# Altium PCB MGMEZZ02.PCBDOC (part 4 of 5)
Units mil, origin at the board's own origin, x right, y up, seen from the top; angles counter-clockwise.
Board outline 5705.83 x 3625.73 mil, 6 copper layers (Top Layer, Internal Plane 1, Mid-Layer 1, Mid-Layer 2, Internal Plane 2, Bottom Layer); 570 components, 354 nets, 2192 pads, 728 vias.
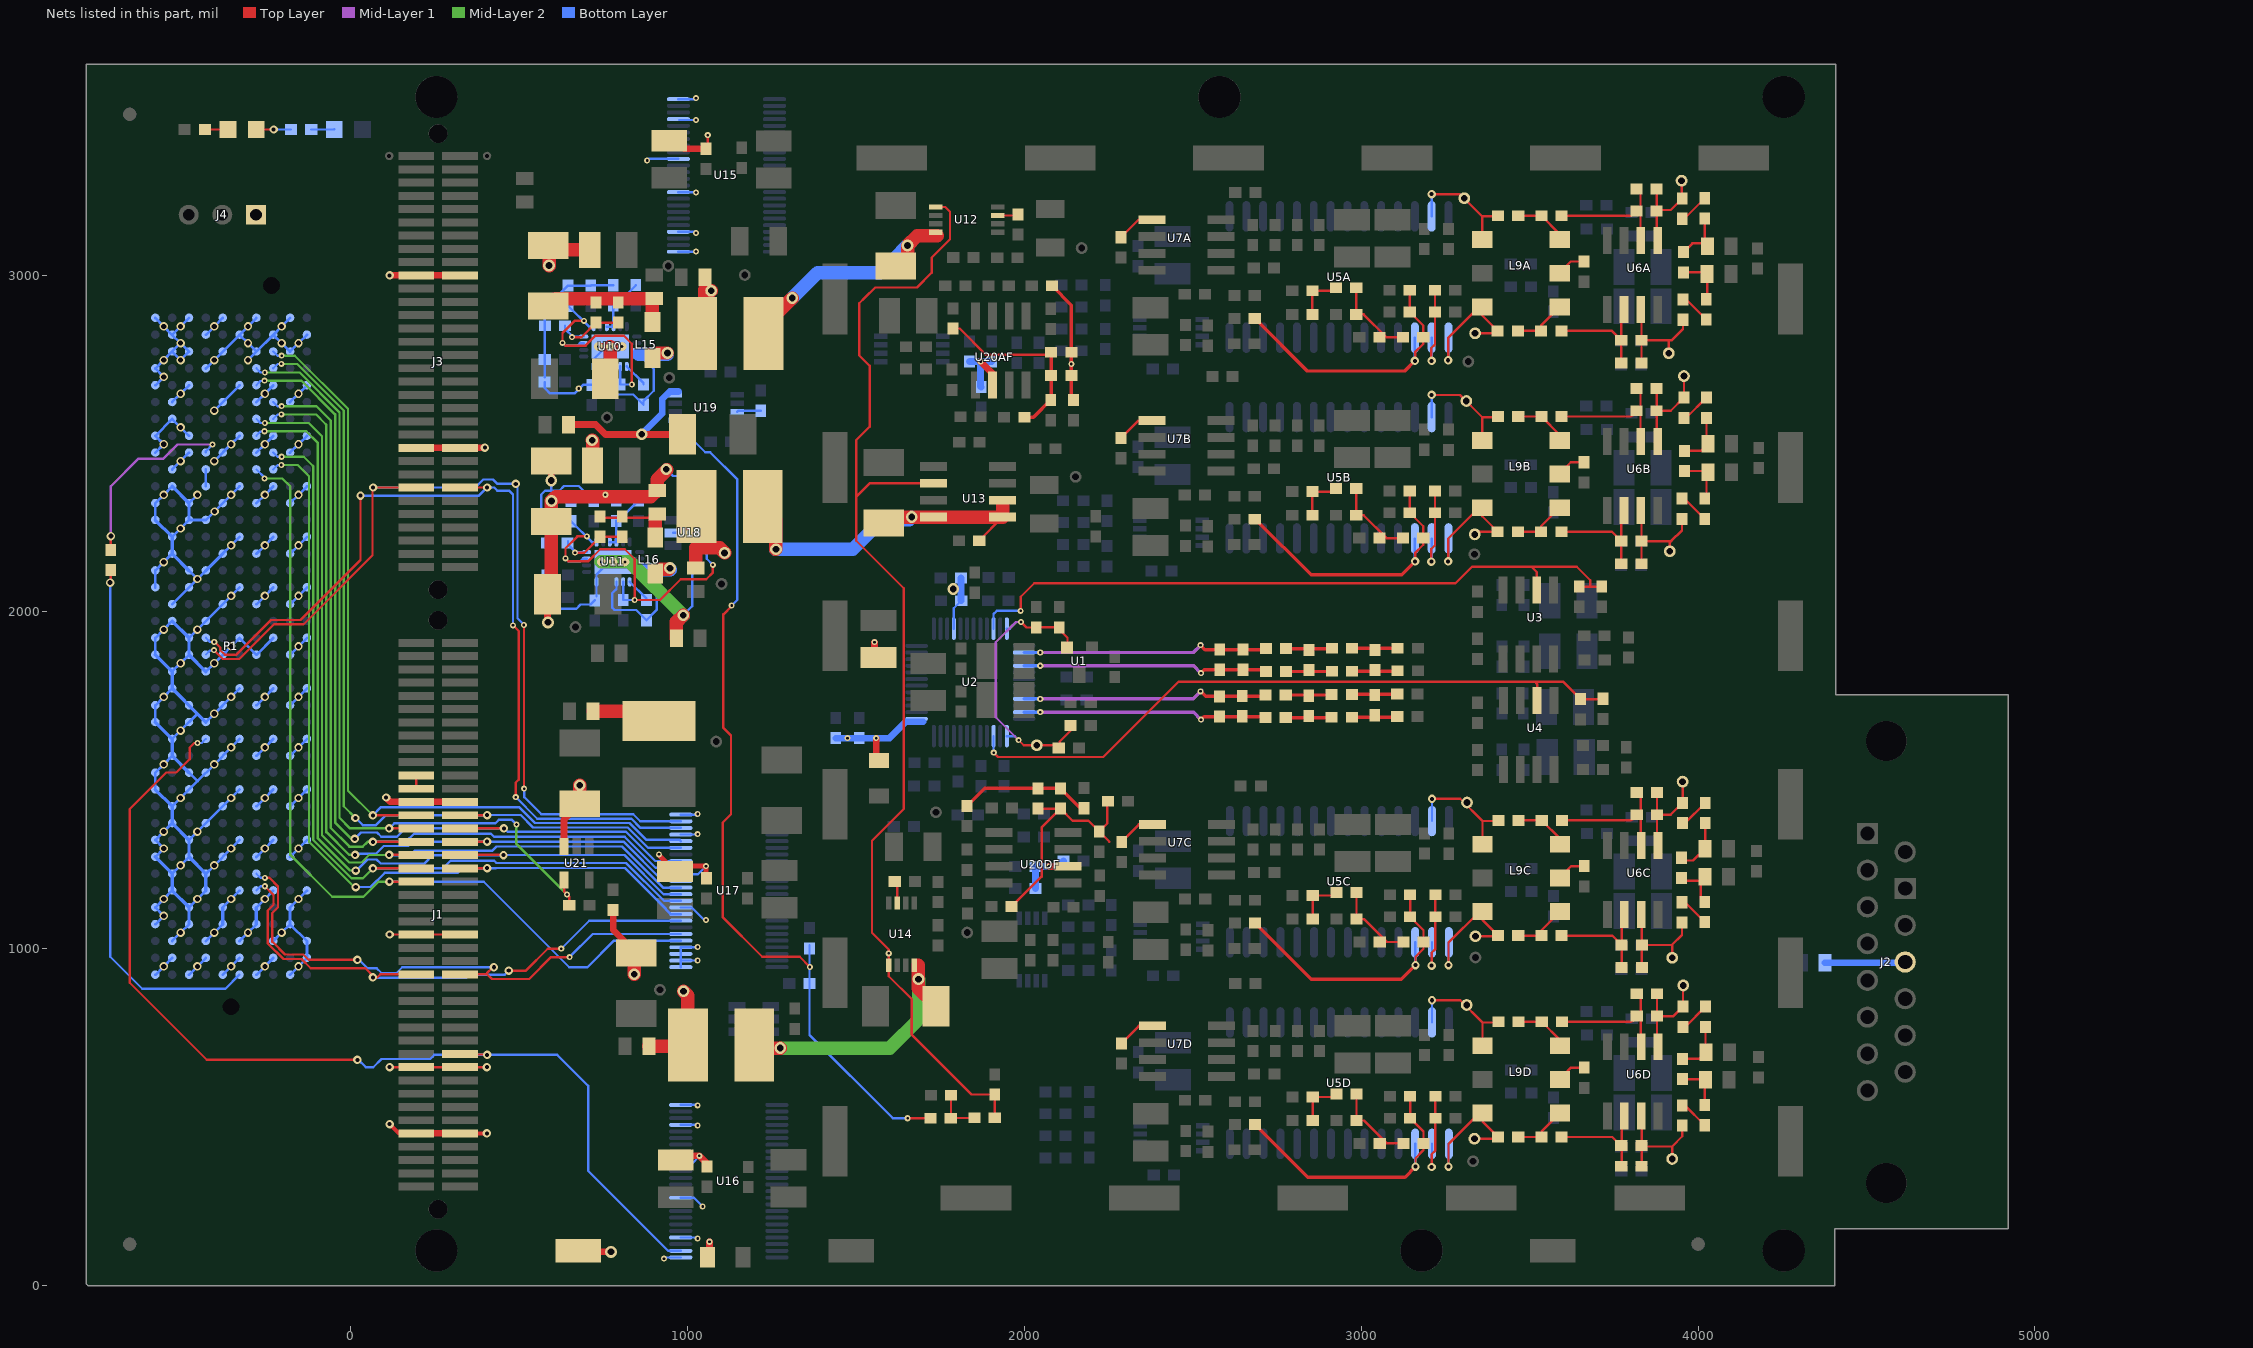
[diagram p8: the nets of this part, all layers, seen from the top]

## Via types
v1: diameter 25, hole 12, Top Layer to Bottom Layer, 292 vias
v2: diameter 18, hole 8, Top Layer to Bottom Layer, 225 vias
v3: diameter 25, hole 15, Top Layer to Bottom Layer, tented both sides, 91 vias
v4: diameter 18, hole 8, Top Layer to Bottom Layer, tented both sides, 61 vias
v5: diameter 35, hole 20, Top Layer to Bottom Layer, 58 vias
v6: diameter 40, hole 20, Top Layer to Bottom Layer, 1 vias

## Nets (pads, with @x,y where several pads share a name; then routed paths per layer and width w, separated by ;. In a path a pad name is that pad's centre, name@x,y a point inside that pad or via, vN(x,y) a via of type N, cw(c..) or ccw(c..) an arc to the next point about the centre after c; other vN are vias at no path point) (continued)
MBDACDATACD15: J1.64 P1.D15 U16.26 | length 3071.7
  Top Layer w7: v4(-454.98,1610.49) -464.51,1610.49 -478,1597 -478,1562.8 -517.8,1523 -547.54,1523 -656,1414.54 -656,899.08 -427.16,670.23 v1@21.23,670.23 ; J1.64@324.55,688 v1(404.85,684.73)
  Bottom Layer w6.5: v4(-454.98,1610.49) -442.48,1610.49 P1.D15@-429.98,1622.99
  Bottom Layer w7: v1@22,671 45,648 67,648 91.78,672.78 235.93,672.78 247.88,684.73 v1(404.85,684.73) 613.11,684.73 705,592.84 705,340 941.81,103.19 U16.26@979.74,103.19
  other v1: 20,670.23
MBFASTDACCLKA: J3.51 P1.D20 U17.47 | length 2842.6
  Top Layer w6.5: v4(-405.74,1886.25) -379.74,1860.25 -330.75,1860.25 -227.75,1963.25 -139.75,1963.25 64.9,2167.9 v1@64.9,2369.27
  Top Layer w7: v1@64.9,2369.27 v1(66.55,2369.27) J3.51@194.63,2369.27 ; v2(515,1475) 514.5,1475.5 514.5,1960.7 v2@515,1961.2
  Bottom Layer w6.5: P1.D20@-429.98,1872.99 -417.48,1885.49 -404.98,1885.49 v4(-405.74,1886.25)
  Bottom Layer w7: v1(66.55,2369.27) 369.98,2369.27 393.62,2393.13 422.63,2393.13 435.77,2380 485,2380 495,2370 495,1981.25 v2@515,1961.25 ; v2(515,1475) 515,1450 566,1399 838.75,1399 859.41,1378.34 U17.47@980.1,1378.34
  other v1: 490,2380
  other v2: 514,1961.2
MBFASTDACCLKB: J3.52 P1.D21 U17.46 | length 2782.4
  Top Layer w7: v4(-404.98,1910.49) -403.81,1910.49 -387.24,1893.92 -387.24,1886.24 -374,1873 -339.29,1873 -236.29,1976 -149,1976 29,2154 v1(29,2345) ; J3.52@324.55,2369.27 v1(404.85,2369.27) ; v2(482,1960) 499,1943 499,1502 490,1493 v2(490,1450)
  Bottom Layer w6.5: P1.D21@-429.98,1922.99 -417.48,1910.49 v4(-404.98,1910.49)
  Bottom Layer w7: v1(29,2345) 380.58,2345 v1(404.85,2369.27) 426.07,2369.27 435.33,2360 470,2360 482,2348 v2@482,1958 ; v2(490,1450) 554,1386 833.37,1386 860.71,1358.66 U17.46@980.1,1358.66
MBFASTDACCLKC: J1.51 P1.G6 U17.32 | length 1675.2
  Top Layer w7: v4(-254.98,1185.49) -229,1159.51 -229,1130.38 -246,1113.38 -246,1015.62 -199.9,969.52 -145.86,969.52 -118.35,942 44,942 71,915 79,915 87.8,923.8 J1.51@194.52,923.8 ; v1(469.23,935) 520,935 585,1000 v2(625,1000)
  Bottom Layer w6.5: P1.G6@-279.98,1172.99 -267.48,1185.49 v4(-254.98,1185.49)
  Bottom Layer w7: 79,915 80,914 344,914 352.99,922.99 457.22,922.99 v1(469.23,935) ; v2(625,1000) 708.07,1083.07 U17.32@980.1,1083.07
  other v1: 66,915
MBFASTDACCLKD: J1.52 P1.G7 U17.30 | length 1700.6
  Top Layer w7: v4(-254.98,1210.49) -241.49,1210.49 -216,1185 -216,1123 -233,1106 -233,1021 -195,983 -140.96,983 -124.96,967 v1@25,967 ; J1.52@324.55,924.2 404.85,924.2 ; v1@420,943 404.85,927.85 404.85,924.2 ; v2(650,975) 595,975 530,910 419.05,910 404.85,924.2
  Bottom Layer w6.5: P1.G7@-279.98,1222.99 -267.48,1210.49 v4(-254.98,1210.49)
  Bottom Layer w7: v1@22.5,969.5 50,942 76.93,942 91.93,927 135,927 153,945 v1(425,945) ; v2(650,975) 718.7,1043.7 U17.30@980.1,1043.7
  other v1: 20,967
MBGND: C32.1 C38.1 C39.1 C40.1 C46.1 C49.2 C50.1 C51.2 C54.1 C55.2 C56.1 C57.1 C59.1 C97.2 C100.1 C104.2 C107.2 C114.2 C115.2 C118.2 C119.2 C122.2 C123.2 C127.2 DP1.2 J1.25 J1.26 J1.45 J1.46 J1.65 J1.66 J1.75 J1.76 J3.19 J3.20 J3.45 J3.46 J4.1 J5.1 P1.A1 P1.A4 P1.A5 P1.A8 P1.A9 P1.A12 P1.A13 P1.A16 P1.A17 P1.A20 P1.A21 P1.A24 P1.A25 P1.A28 P1.A29 P1.A32 P1.A33 P1.A36 P1.A37 P1.A40 P1.B2 P1.B3 P1.B6 P1.B7 P1.B10 P1.B11 P1.B14 P1.B15 P1.B18 P1.B19 P1.B22 P1.B23 P1.B26 P1.B27 P1.B30 P1.B31 P1.B34 P1.B35 P1.B38 P1.B39 P1.C1 P1.C4 P1.C5 P1.C8 P1.C9 P1.C12 P1.C13 P1.C16 P1.C17 P1.C20 P1.C21 P1.C24 P1.C25 P1.C28 P1.C29 P1.C32 P1.C33 P1.C36 P1.C38 P1.C40 P1.D2 P1.D3 P1.D6 P1.D7 P1.D10 P1.D13 P1.D16 P1.D19 P1.D22 P1.D25 P1.D28 P1.D37 P1.D39 P1.E1 P1.E4 P1.E5 P1.E8 P1.E11 P1.E14 P1.E17 P1.E20 P1.E23 P1.E26 P1.E29 P1.E32 P1.E35 P1.E38 P1.E40 P1.F2 P1.F3 P1.F6 P1.F9 P1.F12 P1.F15 P1.F18 P1.F21 P1.F24 P1.F27 P1.F30 P1.F33 P1.F36 P1.F39 P1.G1 P1.G4 P1.G5 P1.G8 P1.G11 P1.G14 P1.G17 P1.G20 P1.G23 P1.G26 P1.G29 P1.G32 P1.G35 P1.G38 P1.G40 P1.H2 P1.H3 P1.H6 P1.H9 P1.H12 P1.H15 P1.H18 P1.H21 P1.H24 P1.H27 P1.H30 P1.H33 P1.H36 P1.H39 P1.J1 P1.J4 P1.J5 P1.J8 P1.J11 P1.J14 P1.J17 P1.J20 P1.J23 P1.J26 P1.J29 P1.J32 P1.J35 P1.J38 P1.J40 P1.K2 P1.K3 P1.K6 P1.K9 P1.K12 P1.K15 P1.K18 P1.K21 P1.K24 P1.K27 P1.K30 P1.K33 P1.K36 P1.K39 R59.2 R64.1 R66.1 R68.2 R70.1 R72.1 R75.2 R80.1 R81.1 R103.1 U2.25 U2.40 U10.6 U10.21 U15.25 U15.28 U15.34 U15.39 U15.45 U15.48 U16.25 U16.28 U16.34 U16.39 U16.45 U16.48 U17.25 U17.26 U17.27 U17.28 U17.34 U17.39 U17.45 U17.48 U21.3 | length 15254.7
  Top Layer w7: DP1.2@-280.4,3432.18 v1@-229.18,3432.18 ; v1(115.87,648.63) v1(404.35,648.63) v1@403.55,649.43 ; v1(115.87,1042.3) J1.46@324.55,1042.3 ; v1@403.55,452.6 v1(404.35,451.8) ; C115.2@1055,3375 1060,3380 v2(1060,3415)
  Top Layer w12: v1(115.6,479) 142.8,451.8 J1.75@194.63,451.8 ; J1.76@324.55,451.8 v1(404.35,451.8)
  Top Layer w15: v2(915,1280) 915,1277.2 C122.2@962.81,1229.39 978.43,1245 v2(1055,1245) 1055,1210.78 C123.2@1056.42,1209.36
  Top Layer w20: v1@-229.18,3432.18 v1(-229,3432) ; v1(105,1449) 118.03,1435.97 J1.26@324.55,1435.97 ; v1(115.87,2999.13) J3.20@324.55,2999.13 ; J1.75@194.63,451.8 J1.76@324.55,451.8 ; J3.45@194.63,2487.37 v1(398.37,2487.37) ; v5(585.77,1968.83) 584.3,1970.3 C100.1@584.3,2052.12 C100.1@595.32,2063.14 ; C55.2@586.73,3087.57 588.99,3085.3 C55.2@599.97,3074.33 ; C56.1@595.32,2267.88 C56.1@595.97,2268.53 ; U21.3@633.5,1303.53 633.5,1383.78 C107.2@680.12,1430.4 ; J5.1@675,103.75 678.75,100 v5(773,100) ; U10.21@735.5,2787.76 U10.21@770.5,2787.75 U10.21@805.5,2787.76 ; C97.2@755.71,2691.81 C97.2@770.5,2706.6 ; C127.2@779.09,1115 779.09,1056.4 C104.2@847.88,987.6 ; C114.2@945.87,3398.85 966.15,3398.85 990,3375 C115.2@1055,3375 ; C118.2@964.96,372.56 977.4,385 v2(1035,385) 1057.49,362.51 C119.2@1057.49,353.4 ; R80.1@1059.64,84.11 1065,89.47 v2(1065,130) ; v2(1555,1910) 1555,1876.65 C32.1@1567.31,1864.34 ; v2(1560,1625) 1560,1567.21 R81.1@1568.38,1558.83
  Top Layer w40: v5(588.99,3028.18) C55.2@588.99,3085.3 ; C100.1@595.32,2063.14 C56.1@595.32,2267.88 ; C56.1@595.97,2268.53 v5(595.97,2329.19) 608.05,2341.26 890.36,2341.26 R59.2@909.38,2360.28 909.38,2392.24 v5@938.5,2421.37 ; C55.2@599.97,3074.33 C51.2@709.36,3074.33 ; v5(680,1485) 680,1430.52 C107.2@680.12,1430.4 ; v5(716.72,2509.24) 717.95,2508.01 C49.2@717.95,2434.64 ; C97.2@770.5,2706.6 U10.21@770.5,2787.75 ; v5(842,924.2) 842,981.72 C104.2@847.88,987.6
  Bottom Layer w7: v1(-229,3432) R103.1@-177,3432 ; R70.1@575.85,2682.31 575.85,2664.33 591.68,2648.5 664.47,2648.5 689.86,2673.88 R68.2@715.64,2673.88 ; R70.1@576.1,2696.81 576.1,2899.22 C57.1@645.51,2968.62 R66.1@712.9,2968.62 714.05,2969.78 C54.1@779.72,2969.78 ; v5(595.97,2329.19) 596.22,2328.94 C59.1@654.09,2328.94 ; R68.2@721.29,2685.57 U10.6@721.29,2728.7 721.29,2750.72 748.93,2778.37 761.11,2778.37 U10.21@770.5,2787.75 ; v2(755.93,2347.59) 770.8,2347.59 C50.1@788.3,2330.09 ; v2(880,3340) 884.64,3344.64 U15.39@972.73,3344.64 ; v2(930,80) 933.51,83.51 U16.25@979.74,83.51 ; v5(936.5,2423.37) 956.46,2403.41 R75.2@983.97,2403.41 ; U15.25@972.73,3069.05 1024.05,3069.05 v2(1025,3070) ; U15.28@972.73,3128.11 1021.89,3128.11 v2(1025,3125) ; U15.34@972.73,3246.22 1023.78,3246.22 v2(1025,3245) ; U15.48@972.73,3521.81 1021.81,3521.81 v2(1025,3525) ; U15.45@975.49,3460 v2(1025,3460) ; U16.28@979.74,142.56 1027.44,142.56 v2(1030,140) ; U16.34@979.74,260.67 1019.33,260.67 v2(1045,235) ; U16.39@979.74,359.1 984.02,363.38 1014.67,363.38 1035,383.71 v2(1035,385) ; U16.45@979.74,477.21 1027.79,477.21 v2(1030,475) ; U16.48@979.74,536.26 1028.74,536.26 v2(1030,535) ; U17.25@980.1,945.27 U17.26@980.1,964.96 ; U17.34@980.1,1122.44 1012.56,1122.44 v2@1052.5,1082.5 ; U17.39@980.1,1220.86 1030.86,1220.86 v2(1055,1245) ; U17.45@980.1,1338.97 1028.97,1338.97 v2(1030,1340) ; U17.48@980.1,1398.03 v2@1028.03,1398.03 ; v2(1030,965) 1029.96,964.96 U17.26@980.1,964.96 ; v2(1030,1005) 1029.33,1004.33 U17.28@980.1,1004.33 U17.27@980.1,984.64 U17.26@980.1,964.96 ; U2.40@1790.37,1950.23 1790.37,2010.57 C40.1@1812.59,2032.78
  Bottom Layer w8: P1.A1@-579.98,922.52 v3(-554.98,947.52) P1.B2@-529.98,972.52 ; P1.A4@-579.98,1072.52 v3(-554.98,1097.52) -579.98,1122.52 v3(-554.98,1147.52) P1.B6@-529.98,1172.52 ; P1.A8@-579.98,1272.52 v3(-554.98,1297.52) -579.98,1322.52 v3(-554.98,1347.52) P1.B10@-529.98,1372.52 ; P1.A12@-579.98,1472.52 -579.98,1522.52 v3(-554.98,1547.52) P1.B14@-529.98,1572.52 ; P1.A16@-579.98,1672.52 -579.98,1722.52 v3(-554.98,1747.52) P1.B18@-529.98,1772.52 ; P1.A20@-579.98,1872.52 -579.98,1922.52 v3(-554.98,1947.52) P1.B22@-529.98,1972.52 ; P1.A24@-579.98,2072.52 -579.98,2122.52 v3(-554.98,2147.52) P1.B26@-529.98,2172.52 ; P1.A28@-579.98,2272.52 -579.98,2322.52 v3(-554.98,2347.52) P1.B30@-529.98,2372.52 ; P1.A32@-579.98,2472.52 v3(-554.98,2497.52) -579.98,2522.52 -529.98,2572.52 v3(-504.98,2547.52) P1.C33@-479.98,2522.52 ; P1.A36@-579.98,2672.52 v3(-554.98,2697.52) -579.98,2722.52 v3(-554.98,2747.52) P1.B38@-529.98,2772.52 ; P1.A40@-579.98,2872.52 v3(-554.98,2847.52) P1.B39@-529.98,2822.52 ; P1.B3@-529.98,1022.52 v3(-504.98,1047.52) P1.C4@-479.98,1072.52 ; P1.B7@-529.98,1222.52 v3(-504.98,1247.52) P1.C8@-479.98,1272.52 ; P1.B11@-529.98,1422.52 v3(-504.98,1447.52) -454.98,1497.52 ; P1.B15@-529.98,1622.52 v3(-504.98,1647.52) -454.98,1697.52 ; P1.B19@-529.98,1822.52 v3(-504.98,1847.52) P1.C20@-479.98,1872.52 ; P1.B23@-529.98,2022.52 v3(-454.98,2097.52) ; P1.B27@-529.98,2222.52 v3(-504.98,2247.52) -479.98,2272.52 -429.98,2272.52 v3@-404.98,2297.52 ; P1.B31@-529.98,2422.52 v3(-504.98,2447.52) P1.C32@-479.98,2472.52 ; P1.B35@-529.98,2622.52 v3(-504.98,2647.52) P1.C36@-479.98,2672.52 ; P1.C1@-479.98,922.52 v3(-454.98,947.52) P1.D2@-429.98,972.52 ; P1.C5@-479.98,1122.52 v3(-454.98,1147.52) P1.D6@-429.98,1172.52 ; P1.C9@-479.98,1322.52 v3(-454.98,1347.52) v3(-354.98,1447.52) P1.F12@-329.98,1472.52 ; P1.C13@-479.98,1522.52 -454.98,1497.52 ; P1.C21@-479.98,1922.52 v3(-454.98,1947.52) v3(-354.98,2047.52) P1.F24@-329.98,2072.52 ; P1.C25@-479.98,2122.52 v3(-454.98,2097.52) ; P1.C29@-479.98,2322.52 v3(-454.98,2347.52) ; P1.C40@-479.98,2872.52 v3(-504.98,2847.52) P1.B39@-529.98,2822.52 ; P1.D3@-429.98,1022.52 v3(-404.98,1047.52) P1.E4@-379.98,1072.52 ; P1.D7@-429.98,1222.52 v3(-404.98,1247.52) v3(-354.98,1297.52) P1.F9@-329.98,1322.52 ; P1.D16@-429.98,1672.52 v3(-404.98,1697.52) v3(-354.98,1747.52) P1.F18@-329.98,1772.52 ; P1.D19@-429.98,1822.52 v3(-404.98,1847.52) -329.98,1922.52 -279.98,1872.52 P1.H21@-229.98,1922.52 ; P1.D25@-429.98,2122.52 v3(-454.98,2097.52) ; P1.D37@-429.98,2722.52 v3(-404.98,2747.52) P1.F39@-329.98,2822.52 ; P1.D39@-429.98,2822.52 v3(-404.98,2847.52) P1.E40@-379.98,2872.52 ; v3(-404.98,2447.52) v3(-354.98,2497.52) P1.F33@-329.98,2522.52 ; v3(-404.98,2597.52) P1.F36@-329.98,2672.52 ; v3(-404,2298) -404.49,2298 v3(-354.98,2347.52) P1.F30@-329.98,2372.52 ; P1.E1@-379.98,922.52 v3(-354.98,947.52) P1.F2@-329.98,972.52 ; P1.E5@-379.98,1122.52 v3(-354.98,1147.52) P1.F6@-329.98,1172.52 ; P1.E26@-379.98,2172.52 v3(-354.98,2197.52) P1.F27@-329.98,2222.52 ; P1.F3@-329.98,1022.52 v3(-304.98,1047.52) P1.G4@-279.98,1072.52 ; P1.F15@-329.98,1622.52 v3(-354.98,1597.52) v3(-404.98,1547.52) -454.98,1497.52 ; v3(-304.98,2747.52) P1.G38@-279.98,2772.52 ; P1.G1@-279.98,922.52 v3(-254.98,947.52) -254.98,947.99 P1.H2@-229.98,972.99 ; P1.G5@-279.98,1122.52 v3(-254.98,1147.52) P1.H6@-229.98,1172.52 ; P1.G8@-279.98,1272.52 v3(-254.98,1297.52) P1.H9@-229.98,1322.52 ; P1.G11@-279.98,1422.52 v3(-254.98,1447.52) P1.H12@-229.98,1472.52 ; P1.G14@-279.98,1572.52 v3(-254.98,1597.52) P1.H15@-229.98,1622.52 ; P1.G17@-279.98,1722.52 v3(-254.98,1747.52) P1.H18@-229.98,1772.52 ; P1.G23@-279.98,2022.52 v3(-254.98,2047.52) P1.H24@-229.98,2072.52 ; P1.G26@-279.98,2172.52 v3(-254.98,2197.52) P1.H27@-229.98,2222.52 ; P1.G29@-279.98,2322.52 v3(-254.98,2347.52) P1.H30@-229.98,2372.52 ; P1.G32@-279.98,2472.52 v3(-254.98,2497.52) P1.H33@-229.74,2522.75 ; P1.G35@-279.98,2622.52 v3(-254.98,2647.52) P1.H36@-229.98,2672.52 ; P1.G40@-279.98,2872.52 v3(-304.98,2847.52) P1.F39@-329.98,2822.52 ; P1.H3@-229.98,1022.52 v3(-204.98,1047.52) P1.J4@-179.98,1072.52 ; P1.J1@-179.98,922.52 v3(-154.98,947.52) -129.98,972.52 -129.98,1022.52 P1.J4@-179.98,1072.52 ; P1.J8@-179.98,1272.52 v3(-154.98,1297.52) P1.K9@-129.98,1322.52 ; P1.J11@-179.98,1422.52 v3(-154.98,1447.52) P1.K12@-129.98,1472.52 ; P1.J14@-179.98,1572.52 v3(-154.98,1597.52) P1.K15@-129.98,1622.52 ; P1.J17@-179.98,1722.52 v3(-154.98,1747.52) P1.K18@-129.98,1772.52 ; P1.J20@-179.98,1872.52 v3(-154.98,1897.52) P1.K21@-129.98,1922.52 ; P1.J23@-179.98,2022.52 v3(-154.98,2047.52) P1.K24@-129.98,2072.52 ; P1.J26@-179.98,2172.52 v3(-154.98,2197.52) P1.K27@-129.98,2222.52 ; P1.J29@-179.98,2322.52 v3(-154.98,2347.52) P1.K30@-129.98,2372.52 ; P1.J32@-179.98,2472.52 v3(-154.98,2497.52) P1.K33@-129.98,2522.52 ; P1.J35@-179.98,2622.52 v3(-154.98,2647.52) P1.K36@-129.98,2672.52 ; P1.J40@-179.98,2872.52 v3(-204.98,2847.52) P1.H39@-229.98,2822.52 ; P1.K6@-129.98,1172.52 v3(-154.98,1147.52) -179.98,1122.52 P1.J4@-179.98,1072.52 ; P1.K39@-129.98,2822.52 v3(-154.98,2797.52) -179.98,2772.52 v3(-204.98,2797.52) P1.H39@-229.98,2822.52 ; P1.B38@-529.98,2772.52 v3(-504.98,2797.52) ; P1.B38@-529.98,2772.52 v3(-504.98,2747.52) -479.98,2772.52 v3(-504.98,2797.52) ; P1.B39@-529.98,2822.52 v3(-504.98,2797.52) ; P1.F39@-329.98,2822.52 v3(-304.98,2797.52) P1.G38@-279.98,2772.52 ; P1.G38@-279.98,2772.52 P1.H39@-229.98,2822.52
  Bottom Layer w10: P1.A8@-579.98,1272.52 -529.98,1222.52 -529.98,1172.52 -479.98,1122.52 P1.C4@-479.98,1072.52 ; P1.A12@-579.98,1472.52 -529.98,1422.52 -529.98,1372.52 -479.98,1322.52 -479.98,1272.52 -429.98,1222.52 P1.D6@-429.98,1172.52 ; P1.A16@-579.98,1672.52 -529.98,1622.52 -529.98,1572.52 P1.C13@-479.98,1522.52 ; P1.A20@-579.98,1872.52 -529.98,1822.52 -529.98,1772.52 -454.98,1697.52 P1.D16@-429.98,1672.52 ; P1.A28@-579.98,2272.52 -529.98,2222.52 -529.98,2172.52 P1.C25@-479.98,2122.52 ; P1.B22@-529.98,1972.52 -479.98,1922.52 -479.98,1872.52 P1.D19@-429.98,1822.52 ; P1.B30@-529.98,2372.52 -479.98,2322.52 P1.C28@-479.98,2272.52 ; P1.D25@-429.98,2122.52 P1.E26@-379.98,2172.52 ; P1.E4@-379.98,1072.52 P1.E5@-379.98,1122.52 ; P1.G4@-279.98,1072.52 P1.G5@-279.98,1122.52
  Bottom Layer w15: v2@1028.03,1398.03 v2(1030,1400)
  Bottom Layer w20: C39.1@1440,1625 C38.1@1510,1625 v2(1560,1625) 1600,1625 1649,1674 1699,1674 ; v5(1788.95,2068.14) 1809.73,2068.14 1811.59,2070 ; C46.1@1811.59,2100.78 1811.59,2070 ; C40.1@1812.59,2032.78 1811.59,2033.78 1811.59,2070
  other v2: 1055,1085 1475,1625 676.96,2663
  other v3: -355,1897.52
MBPOWERENABLE: J1.36 P1.H31 U17.33 | length 2534.3
  Top Layer w7: J1.36@324.55,1239.13 v1(404.85,1239.13)
  Mid-Layer 2 w6.5: v4(-205.74,2436.25) -157.5,2436.25 -124,2402.75 -124,1317.58 10.58,1183 v1(15,1183)
  Bottom Layer w6.5: P1.H31@-229.98,2422.99 -217.48,2435.49 -204.98,2435.49 v4(-205.74,2436.25)
  Bottom Layer w7: v1@14,1183 v1(15,1183) 59,1183 101,1225 317,1225 331.13,1239.13 v1(404.85,1239.13) 430.85,1239.13 431.25,1239.53 814.37,1239.53 936.15,1117.76 936.15,1116.06 949.45,1102.75 U17.33@980.1,1102.75
MBSPI_CLK: J1.28 P1.H37 U17.43 | length 2605.5
  Top Layer w7: J1.28@324.55,1396.6 v1(404.85,1396.6)
  Mid-Layer 2 w6.5: v4(-205.74,2736.25) -159.22,2736.25 -20.5,2597.53 -20.5,1422.5 v1(14,1388)
  Bottom Layer w6.5: P1.H37@-229.98,2722.99 -217.48,2735.49 -204.98,2735.49 v4(-205.74,2736.25)
  Bottom Layer w7: v1(14,1388) 15,1388 36,1367 75,1367 104.6,1396.6 v1(404.85,1396.6) 405.07,1396.82 504.8,1396.82 541.62,1360 822.6,1360 882.99,1299.6 U17.43@980.1,1299.6
MBSPI_CURRENTA_CS: J1.32 P1.H34 U17.38 | length 2615.8
  Top Layer w7: J1.32@324.55,1317.87 v1(404.85,1317.87)
  Mid-Layer 2 w6.5: v4(-205.74,2586.25) -103.25,2586.25 -74,2557
  Mid-Layer 2 w7: -74,2557 -72.25,2555.25 -72.25,1346.25 -4.5,1278.5 v1(13,1278.5)
  Bottom Layer w6.5: P1.H34@-229.98,2572.99 -217.48,2585.49 -204.98,2585.49 v4(-205.74,2586.25)
  Bottom Layer w7: v1@11,1274 19,1282 74.97,1282 97.97,1305 170,1305 182.87,1317.87 v1(404.85,1317.87) 809.58,1317.87 926.27,1201.18 U17.38@980.1,1201.18
MBSPI_CURRENTB_CS: J1.30 P1.G36 U17.41 | length 2734.4
  Top Layer w7: J1.30@324.55,1357.23 453.33,1357.23 453.63,1357.53 v1(454.63,1357.53)
  Mid-Layer 2 w7: v4(-255.74,2686.25) -146.25,2686.25 -46.25,2586.25 -46.25,1374.25 2,1326 v1(12,1326)
  Bottom Layer w6.5: P1.G36@-279.98,2672.99 -267.48,2685.49 -254.98,2685.49 v4(-255.74,2686.25)
  Bottom Layer w7: v1(12,1326) 31,1345 78.52,1345 90.98,1332.53 137.53,1332.53 162.53,1357.53 v1(454.63,1357.53) 455.1,1357.53 465.63,1347 817.21,1347 903.98,1260.23 U17.41@980.1,1260.23
MBSPI_CURRENTC_CS: J1.34 P1.G33 U17.36 | length 2702.8
  Top Layer w7: J1.34@324.55,1278.5 452.67,1278.5 v1(453.63,1277.53)
  Mid-Layer 2 w7: v4(-255.74,2536.25) -132,2536.25 -98.25,2502.5 -98.25,1328.25 -2,1232 v1(15,1232)
  Bottom Layer w6.5: P1.G33@-279.98,2522.99 -267.48,2535.49 -254.98,2535.49 v4(-255.74,2536.25)
  Bottom Layer w7: v1@14,1232 v1(15,1232) 16.87,1232 49.87,1265 77.07,1265 89.07,1253 219,1253 243.53,1277.53 v1(453.63,1277.53) 454.1,1278 812.68,1278 928.87,1161.81 U17.36@980.1,1161.81
MBSPI_CURRENTD_CS: J1.35 P1.H32 U17.35 | length 2584.6
  Top Layer w6.5: v4(-204.98,2460.49) v4@-204.17,2460.49
  Top Layer w7: v1(65.55,1238.37) 66.32,1239.13 J1.35@194.63,1239.13
  Mid-Layer 2 w6.5: v4(-204.98,2460.49) -139.49,2460.49 -113,2434
  Mid-Layer 2 w7: -113,2434 -111.25,2432.25 -111.25,1322.87 2.62,1209 36.18,1209 v1(65.55,1238.37)
  Bottom Layer w6.5: P1.H32@-229.98,2472.99 -217.48,2460.49 v4(-204.98,2460.49)
  Bottom Layer w7: v1(65.55,1238.37) 273.37,1238.37 296.13,1261.13 426.03,1261.13 432.63,1254.53 817.76,1254.53 930.17,1142.12 U17.35@980.1,1142.12
MBSPI_MISO: J1.29 P1.G37 R101.1 U21.4 | length 2490.8
  Top Layer w6.5: v4(-254.98,2710.49) v4@-254.17,2710.49
  Top Layer w7: v1(114.33,1357.23) J1.29@194.63,1357.23 ; U21.4@633.5,1203.53 633.5,1169.5 v2(642,1161) 649,1154 R101.1@649,1129
  Mid-Layer 2 w7: v4(-254.98,2710.49) -151.49,2710.49 -33.25,2592.25 -33.25,1388.78 -1.7,1357.23 v1(114.33,1357.23) ; v2(492,1369) 492,1311 v2(642,1161)
  Bottom Layer w6.5: P1.G37@-279.98,2722.99 -267.48,2710.49 v4(-254.98,2710.49)
  Bottom Layer w7: v1(114.33,1357.23) 129.63,1372.53 429.8,1372.53 439.63,1382.37 478.63,1382.37 v2(492,1369)
MBSPI_MOSI: J1.27 P1.H38 U17.44 | length 2626.6
  Top Layer w6.5: v4(-204.98,2760.49) v4@-204.17,2760.49
  Top Layer w7: v1(65.55,1395.83) 66.32,1396.6 J1.27@194.63,1396.6
  Mid-Layer 2 w6.5: v4(-204.98,2760.49) -165.78,2760.49 -8,2602.71 -8,1469.38 v1(65.55,1395.83)
  Bottom Layer w6.5: P1.H38@-229.98,2772.99 -217.48,2760.49 v4(-204.98,2760.49)
  Bottom Layer w7: v1(65.55,1395.83) 89.98,1420.27 499.73,1420.27 547,1373 827.98,1373 877.98,1323 976.39,1323 U17.44@980.1,1319.29
MBSPI_OFFSETA_CS: J1.31 P1.H35 U17.40 | length 2653.6
  Top Layer w6.5: v4(-204.98,2610.49) v4@-204.17,2610.49
  Top Layer w7: v1(65.55,1317.1) 66.32,1317.87 J1.31@194.63,1317.87
  Mid-Layer 2 w7: v4(-204.98,2610.49) -101.49,2610.49 -59.25,2568.25 -59.25,1358.25 -4,1303 36,1303 50.1,1317.1 v1(65.55,1317.1)
  Bottom Layer w6.5: P1.H35@-229.98,2622.99 -217.48,2610.49 v4(-204.98,2610.49)
  Bottom Layer w7: v1(65.55,1317.1) 66.45,1318 164.62,1318 188.15,1341.53 416.63,1341.53 425.63,1332.53 813.3,1332.53 905.28,1240.55 U17.40@980.1,1240.55
MBSPI_OFFSETC_CS: J1.33 P1.G34 U17.37 | length 2651.6
  Top Layer w6.5: v4(-254.98,2560.49) v4@-254.17,2560.49
  Top Layer w7: v1(114.33,1278.5) J1.33@194.63,1278.5
  Mid-Layer 2 w6.5: v4(-254.98,2560.49) -124.49,2560.49 -85,2521 -85,1336.49 -4.51,1256 33,1256 55.5,1278.5 v1(114.33,1278.5)
  Bottom Layer w6.5: P1.G34@-279.98,2572.99 -267.48,2560.49 v4(-254.98,2560.49)
  Bottom Layer w7: v1(114.33,1278.5) 115.3,1277.53 176.63,1277.53 189.63,1290.53 419.63,1290.53 432.63,1303.53 805.53,1303.53 927.57,1181.49 U17.37@980.1,1181.49
MBTEMPSENSE_CS: J1.37 P1.G31 U17.29 | length 2663.3
  Top Layer w7: v1(115,1199) 194.15,1199 J1.37@194.52,1199.37
  Mid-Layer 2 w7: v4(-255.74,2396) -203,2396 -179,2372 -179,1278.5 -54.5,1154 38,1154 83,1199 v1(115,1199)
  Bottom Layer w6.5: P1.G31@-279.98,2422.99 v4@-254.36,2397.38
  Bottom Layer w7: v1(115,1199) 395,1199 649,945 703,945 782.01,1024.01 U17.29@980.1,1024.01
NetAmpNA_1: AmpNA.1 C66A.2 C73A.2 R19A.2 U6A.1 | length 302.2
  Top Layer w7: C66A.2@3877,3259 R19A.2@3877,3193 ; U6A.1@3880,3102 3877,3105 R19A.2@3877,3193 ; AmpNA.1@3951,3280 3951,3229 C73A.2@3953,3227 3919,3193 R19A.2@3877,3193
NetAmpNB_1: AmpNB.1 C66B.2 C73B.2 R19B.2 U6B.1 | length 319.4
  Top Layer w7: C66B.2@3877,2663 R19B.2@3877,2597 ; U6B.1@3880,2506 3877,2509 R19B.2@3877,2597 ; AmpNB.1@3958,2700 C73B.2@3958,2636 3919,2597 R19B.2@3877,2597
NetAmpNC_1: AmpNC.1 C66C.2 C73C.2 R19C.2 U6C.1 | length 311.7
  Top Layer w7: C66C.2@3878,1464 R19C.2@3878,1398 ; U6C.1@3881,1307 3878,1310 R19C.2@3878,1398 ; AmpNC.1@3954,1496 C73C.2@3954,1433 3919,1398 R19C.2@3878,1398
NetAmpND_1: AmpND.1 C66D.2 C73D.2 R19D.2 U6D.1 | length 310.3
  Top Layer w7: C66D.2@3878,866 R19D.2@3878,800 ; U6D.1@3881,709 3878,712 R19D.2@3878,800 ; AmpND.1@3956,891 3955,890 C73D.2@3955,828 3927,800 R19D.2@3878,800
NetAmpPA_1: AmpPA.1 C74A.2 C77A.2 R24A.2 U6A.7 | length 380.3
  Top Layer w7: U6A.7@3830,2916 U6A.7@3830,2897 3832,2895 R24A.2@3832,2806 ; C77A.2@3832,2739 R24A.2@3832,2806 ; AmpPA.1@3913,2768 3913,2805 3914,2806 ; C74A.2@3955,2867 3955,2840 3921,2806 3914,2806 ; R24A.2@3832,2806 3914,2806
NetAmpPB_1: AmpPB.1 C74B.2 C77B.2 R24B.2 U6B.7 | length 376.7
  Top Layer w7: U6B.7@3830,2320 U6B.7@3830,2301 3832,2299 R24B.2@3832,2210 ; C77B.2@3832,2143 R24B.2@3832,2210 ; AmpPB.1@3916,2180 3916,2206 3920,2210 ; C74B.2@3952,2276 3952,2242 3920,2210 ; R24B.2@3832,2210 3920,2210
NetAmpPC_1: AmpPC.1 C74C.2 C77C.2 R24C.2 U6C.7 | length 384.7
  Top Layer w7: U6C.7@3831,1121 U6C.7@3831,1102 3833,1100 R24C.2@3833,1011 ; C77C.2@3833,944 R24C.2@3833,1011 ; AmpPC.1@3923,973 3923,1010 3922,1011 ; C74C.2@3952,1078 3952,1041 3922,1011 ; R24C.2@3833,1011 3922,1011
NetAmpPD_1: AmpPD.1 C74D.2 C77D.2 R24D.2 U6D.7 | length 379.3
  Top Layer w7: U6D.7@3831,523 U6D.7@3831,504 3833,502 R24D.2@3833,413 ; C77D.2@3833,346 R24D.2@3833,413 ; AmpPD.1@3923,376 3923,413 ; C74D.2@3953,475 3953,443 3923,413 ; R24D.2@3833,413 3923,413
NetC7_2: C7.2 C8.2 C17.2 C18.2 U1.2 U2.13 U2.48 VRef.1 | length 977.3
  Top Layer w7: v2(1983,1619) 1998,1604 2096.46,1604 2104.46,1596 2104.46,1614.46 2137,1647 C18.2@2137,1663 ; v2(1990,1970) 2006.22,1953.78 2097.22,1953.78 2128,1923 U1.2@2128,1892 ; C7.2@2035.22,1954 C8.2@2103.22,1954
  Mid-Layer 1 w7: v2(1983,1619) 1915,1687 1915,1910 1975,1970 v2(1990,1970)
  Bottom Layer w7: U2.13@1947.85,1630.77 1971.23,1630.77 v2(1983,1619) ; U2.48@1947.85,1950.23 1956.23,1950.23 1976,1970 v2(1990,1970)
NetC20_1: C20.1 L3.1 R7.1 | length 135.4
  Top Layer w10: L3.1@2973,1824 3107,1824 R7.1@3108,1825
NetC20_2: C20.2 L1.1 R2.1 | length 135
  Top Layer w10: L1.1@2973,1892 R2.1@3108,1892
NetC21_1: C21.1 L3.2 L4.1 | length 136.4
  Top Layer w10: L4.1@2777,1823 2912,1823 L3.2@2913,1824
NetC21_2: C21.2 L1.2 L2.1 | length 136.4
  Top Layer w10: L2.1@2777,1891 2912,1891 L1.2@2913,1892
NetC22_1: C22.1 L4.2 R5.2 U2.4 | length 736.3
  Top Layer w10: v2(2524.07,1818) 2534.07,1828 R5.2@2580,1828 C22.1@2649,1828 2712,1828 L4.2@2717,1823
  Mid-Layer 1 w10: v2(2047,1839.99) 2501.36,1839.99 ; 2502.43,1839.64 v2(2524.07,1818) v2@2527.07,1815
  Bottom Layer w10: U2.4@1999.04,1839.99 v2(2047,1839.99)
NetC22_2: C22.2 L2.2 R5.1 U2.2 | length 737.8
  Top Layer w10: v2(2523,1901) 2536,1888 R5.1@2580,1888 C22.2@2649,1888 2714,1888 L2.2@2717,1891
  Mid-Layer 1 w10: v2(2047,1879.36) 2501.36,1879.36 v2(2523,1901) v2@2526,1904
  Bottom Layer w10: U2.2@1999.04,1879.36 v2(2047,1879.36)
NetC23_2: C23.2 C24.2 U2.46 U3.2 | length 2075.6
  Top Layer w7: v2(1989,2003) 1989,2044.78 2029.02,2084.8 3279.8,2084.8 3329,2134 3505,2134 ; U3.2@3521,2065 3521,2118 3505,2134 ; C24.2@3647,2075 3680,2075 ; C23.2@3714,2075 3680,2075 ; 3505,2134 3640,2134 3680,2094 3680,2075
  Bottom Layer w7: U2.46@1908.48,1950.23 1908.48,1993.48 1918,2003 v2(1989,2003)
NetC26_1: C26.1 L7.1 R16.1 | length 135.8
  Top Layer w10: L7.1@2972,1687 3105,1687 R16.1@3107,1689
NetC26_2: C26.2 L5.1 R10.1 | length 135.4
  Top Layer w10: L5.1@2972,1755 3106,1755 R10.1@3107,1756
NetC27_1: C27.1 L7.2 L8.1 | length 136.4
  Top Layer w10: L8.1@2776,1686 2911,1686 L7.2@2912,1687
NetC27_2: C27.2 L5.2 L6.1 | length 136.8
  Top Layer w10: L6.1@2776,1753 2910,1753 L5.2@2912,1755
NetC28_1: C28.1 L8.2 R13.2 U2.11 | length 729.8
  Top Layer w10: v2(2524.07,1680) 2533.07,1689 R13.2@2579,1689 L8.2@2713,1689
  Mid-Layer 1 w10: v2(2047,1702.2) 2501.36,1702.2 ; 2502.43,1701.64 v2(2524.07,1680) v2@2527.07,1677
  Bottom Layer w10: U2.11@1999.04,1702.2 v2(2047,1702.2)
NetC28_2: C28.2 L6.2 R13.1 U2.9 | length 738.1
  Top Layer w10: v2(2523,1764.07) 2538.07,1749 R13.1@2579,1749 2712,1749 L6.2@2716,1753
  Mid-Layer 1 w10: v2(2047,1741.57) 2501.36,1741.57 ; 2501.36,1742.43 v2(2523,1764.07) v2@2526,1767.07
  Bottom Layer w10: U2.9@1999.04,1741.57 v2(2047,1741.57)
NetC29_2: C29.2 C30.2 U2.15 U4.2 | length 2037.6
  Top Layer w7: v2(1909,1582) 1922,1569 2234,1569 2458,1793 3515,1793 ; U4.2@3522,1737 3522,1786 3515,1793 ; C29.2@3718,1742 3717,1741 C30.2@3651,1741 3599,1793 3515,1793
  Bottom Layer w7: U2.15@1908.48,1631.33 1908.48,1582.52 v2(1909,1582)
NetC48A_1: C48A.1 U7A.1 | length 113.5
  Top Layer w7: C48A.1@2287,3112 2339,3164 U7A.1@2379,3164
NetC48B_1: C48B.1 U7B.1 | length 113.5
  Top Layer w7: C48B.1@2287,2516 2339,2568 U7B.1@2379,2568
NetC48C_1: C48C.1 U7C.1 | length 113.5
  Top Layer w7: C48C.1@2288,1317 2340,1369 U7C.1@2380,1369
NetC48D_1: C48D.1 U7D.1 | length 113.5
  Top Layer w7: C48D.1@2288,719 2340,771 U7D.1@2380,771
NetC50_2: C50.2 R36.1 U11.13 U11.14 | length 182.8
  Bottom Layer w7: U11.13@769.24,2207.12 U11.14@788.93,2207.12 ; U11.14@788.3,2207.75 C50.2@788.3,2270.09 794.46,2270.09 R36.1@854.64,2330.26 ; C50.2@788.3,2263.37 C50.2@795.03,2270.09
NetC52_1: C52.1 L15.1 U10.3 U10.19 U10.20 | length 518.9
  Top Layer w20: L15.1@895.42,2753.93 L15.1@909.93,2768.44
  Top Layer w40: L15.1@909.93,2768.44 v5(940.5,2768.44)
  Bottom Layer w7: U10.3@780.34,2728.7 780.34,2707.83 767.97,2695.45 767.97,2652.25 774.94,2645.28 839.07,2645.28 C52.1@869.39,2614.96 869.39,2626 899.72,2656.32 899.72,2720.68 862.16,2758.23 U10.20@849.24,2758.23
  Bottom Layer w40: 855.45,2764.44 v5@940.5,2764.44
NetC52_2: C52.2 U10.1 | length 74.3
  Bottom Layer w7: U10.1@819.71,2728.7 869.39,2679.02 C52.2@869.39,2674.96
NetC53_1: C53.1 L16.1 U11.3 U11.19 U11.20 | length 514.9
  Top Layer w20: v5@944.26,2126.07 v5(948.01,2129.82)
  Top Layer w40: L16.1@904.01,2114.24 915.84,2126.07 v5@944.26,2126.07
  Bottom Layer w7: U11.3@788.93,2089.01 788.93,2068.14 776.55,2055.76 776.55,2012.56 783.53,2005.59 847.66,2005.59 C53.1@877.98,1975.27 908.3,2005.59 908.3,2077.23 866.99,2118.54 U11.20@857.83,2118.54
  Bottom Layer w40: 864.11,2124.82 v5@948.01,2124.82
NetC53_2: C53.2 U11.1 | length 74.3
  Bottom Layer w7: U11.1@828.3,2089.01 877.98,2039.33 C53.2@877.98,2035.27
NetC54_2: C54.2 R37.2 U10.13 U10.14 | length 174.6
  Bottom Layer w7: U10.13@760.66,2846.81 U10.14@780.34,2846.81 779.72,2847.44 C54.2@779.72,2909.78 786.44,2909.78 R37.2@846.53,2969.87
NetC55_1: C55.1 C58.2 L15.2@895.42,2860.23 R58.1 R60.2 | length 403.8
  Top Layer w7: R58.1@889.41,2918.6 R58.1@895.42,2924.6
  Top Layer w20: R58.1@895.42,2924.6 R58.1@900.79,2929.97
  Top Layer w40: C55.1@586.73,2907.57 609.13,2929.97 R58.1@900.79,2929.97 ; L15.2@895.42,2860.23 R58.1@895.42,2924.6
NetC56_2: C56.2 R65.1 R67.1 R69.2 R73.1 R74.1 R109.2 U11.6 U11.21 U18.2 | length 1562.7
  Top Layer w20: v5(595.32,2390.22) C56.2@595.32,2447.88
  Top Layer w40: R109.2@967,1921 967,1970 v5(987,1990)
  Mid-Layer 2 w40: U11.21@744.09,2148.07 U11.21@814.09,2148.07 828.93,2148.07 v5(987,1990)
  Bottom Layer w7: R74.1@584.43,2042.62 584.43,2024.64 600.26,2008.81 669.49,2008.81 682.64,2021.96 711.99,2021.96 R69.2@724.23,2034.19 ; R74.1@584.68,2057.12 584.68,2289.23 565.92,2307.99 565.92,2348.24 577.19,2359.51 596,2359.51 ; v5(595.32,2390.22) 595.32,2360.19 596,2359.51 ; R67.1@721.49,2328.94 676.96,2373.46 633,2373.46 619.05,2359.51 596,2359.51 ; R69.2@729.87,2045.89 U11.6@729.87,2089.01 729.87,2111.03 757.52,2138.68 769.7,2138.68 U11.21@779.08,2148.07 ; U18.2@957.14,2234.47 994.17,2234.47 1013.49,2215.15 1013.49,2016.49 v5(987,1990)
NetC57_2: C57.2 R62.2 U10.2 U10.9 U10.11 | length 718.2
  Top Layer w7: v2(628.97,2798.49) 637.02,2790.44 697.4,2790.44 726.96,2820 810.59,2820 834.51,2796.08 v2(834.51,2675.06) ; v2@628.97,2798.76 628.97,2828.27 664.39,2863.69 692.3,2863.69 v2(692.43,2863.83)
  Bottom Layer w7: v2(628.97,2798.49) 637.02,2790.44 673.25,2790.44 680.41,2797.6 U10.9@691.76,2797.6 ; C57.2@645.51,2908.62 707.32,2846.81 U10.11@721.29,2846.81 ; U10.2@800.03,2728.7 800.45,2728.28 R62.2@800.45,2674.95 834.41,2674.95 v2(834.51,2675.06)
NetC58_1: C58.1 R60.1 R64.2 U10.10 | length 229.6
  Top Layer w7: v2(657.15,2815.39) 685.32,2815.39 R60.1@728.52,2858.6 C58.1@794.53,2858.6
  Bottom Layer w7: R64.2@636.38,2849.47 636.38,2839.94 659.04,2817.28 U10.10@691.76,2817.28
NetC59_2: C59.2 R63.2 U11.2 U11.9 U11.11 U18.5 | length 1076.4
  Top Layer w7: v2(637.56,2158.8) 645.61,2150.75 705.98,2150.75 740.87,2185.63 813.85,2185.63 843.1,2156.39 v2(843.1,2035.37) 918.5,2035.37 979.68,2096.55 1055.34,2096.55 1075.2,2116.41 v2(1075.2,2139.48) ; v2@637.56,2159.07 637.56,2188.59 672.98,2224 700.89,2224 v2(701.02,2224.14)
  Bottom Layer w7: v2(637.56,2158.8) 645.61,2150.75 681.83,2150.75 688.99,2157.91 U11.9@700.35,2157.91 ; C59.2@654.09,2268.94 715.9,2207.12 U11.11@729.87,2207.12 ; U11.2@808.61,2089.01 809.04,2088.59 R63.2@809.04,2035.27 842.99,2035.27 v2(843.1,2035.37) ; U18.5@1057.14,2196.97 1057.14,2157.55 v2(1075.2,2139.48)
NetC66A_1: C66A.1 R19A.1 R76A.1 U6A.2 | length 391.6
  Top Layer w7: R76A.1@3595,3176 3800,3176 R19A.1@3829,3191 ; U6A.2@3829,3103 3829,3181 R19A.1@3829,3191 ; C66A.1@3829,3257 R19A.1@3829,3191
NetC66B_1: C66B.1 R19B.1 R76B.1 U6B.2 | length 391.6
  Top Layer w7: R76B.1@3595,2580 3800,2580 R19B.1@3829,2595 ; U6B.2@3829,2507 3829,2585 R19B.1@3829,2595 ; C66B.1@3829,2661 R19B.1@3829,2595
NetC66C_1: C66C.1 R19C.1 R76C.1 U6C.2 | length 391.6
  Top Layer w7: R76C.1@3596,1381 3801,1381 R19C.1@3830,1396 ; U6C.2@3830,1308 3830,1386 R19C.1@3830,1396 ; C66C.1@3830,1462 R19C.1@3830,1396
NetC66D_1: C66D.1 R19D.1 R76D.1 U6D.2 | length 391.6
  Top Layer w7: R76D.1@3596,783 3801,783 R19D.1@3830,798 ; U6D.2@3830,710 3830,788 R19D.1@3830,798 ; C66D.1@3830,864 R19D.1@3830,798
NetC68_1: C68.1 R61.1 R65.2 U11.10 | length 229.9
  Top Layer w7: v2(665.74,2175.71) 693.91,2175.71 C68.1@737.11,2218.91 ; C68.1@739.94,2223.02 R61.1@805.99,2223.02
  Top Layer w20: R61.1@805.99,2223.02 R61.1@806.16,2222.84
  Bottom Layer w7: R65.2@644.97,2209.78 644.97,2200.25 667.63,2177.6 U11.10@700.35,2177.6
NetC68_2: C68.2 L16.2@904.01,2220.54 R59.1 R61.2 | length 241.4
  Top Layer w7: C68.2@737.11,2278.91 803.12,2278.91 898,2278.91 R59.1@904.01,2284.91
  Top Layer w20: R59.1@904.01,2284.91 R59.1@909.38,2290.28
  Top Layer w40: L16.2@904.01,2220.54 R59.1@904.01,2284.91
NetC73A_1: C73A.1 R21A.1 | length 92.3
  Top Layer w7: C73A.1@3953,3167 3959,3167 R21A.1@4020,3228
NetC73B_1: C73B.1 R21B.1 | length 91.9
  Top Layer w7: C73B.1@3958,2576 3965,2576 R21B.1@4025,2636
NetC73C_1: C73C.1 R21C.1 | length 91.9
  Top Layer w7: C73C.1@3954,1373 3961,1373 R21C.1@4021,1433
NetC73D_1: C73D.1 R21D.1 | length 91.9
  Top Layer w7: C73D.1@3955,768 3962,768 R21D.1@4022,828
NetC74A_1: C74A.1 R23A.1 | length 93.4
  Top Layer w7: C74A.1@3955,2927 3965,2927 R23A.1@4024,2868
NetC74B_1: C74B.1 R23B.1 | length 92.9
  Top Layer w7: C74B.1@3952,2336 3960,2336 R23B.1@4020,2276
NetC74C_1: C74C.1 R23C.1 | length 92.4
  Top Layer w7: C74C.1@3952,1138 3961,1138 R23C.1@4020,1079
NetC74D_1: C74D.1 R23D.1 | length 91.4
  Top Layer w7: C74D.1@3953,535 3961,535 R23D.1@4020,476
NetC76A_2: C76A.2 C79A.2 U5A.2 | length 282.4
  Top Layer w7: v1@3208,2745 3208,2783 3219,2794 C79A.2@3219,2890 C76A.2@3219,2955
  Bottom Layer w7: v1@3209,2746 U5A.2@3209,2813.88
  other v1: 3209,2745
NetC76B_2: C76B.2 C79B.2 U5B.2 | length 283.9
  Top Layer w7: v1(3208,2149) 3208,2187 3219,2198 C79B.2@3219,2294 C76B.2@3219,2359
  Bottom Layer w7: v1(3208,2149) 3209,2150 U5B.2@3209,2217.88
NetC76C_2: C76C.2 C79C.2 U5C.2 | length 283.9
  Top Layer w7: v1(3209,950) 3209,988 3220,999 C79C.2@3220,1095 C76C.2@3220,1160
  Bottom Layer w7: v1(3209,950) 3210,951 U5C.2@3210,1018.88
NetC76D_2: C76D.2 C79D.2 U5D.2 | length 283.9
  Top Layer w7: v1(3209,352) 3209,390 3220,401 C79D.2@3220,497 C76D.2@3220,562
  Bottom Layer w7: v1(3209,352) 3210,353 U5D.2@3210,420.88
NetC77A_1: C77A.1 R24A.1 R77A.2 U6A.6 | length 350.9
  Top Layer w7: R77A.2@3594,2834 3744,2834 R24A.1@3772,2806 ; C77A.1@3772,2739 R24A.1@3772,2806 ; U6A.6@3780,2897 3772,2889 R24A.1@3772,2806
NetC77B_1: C77B.1 R24B.1 R77B.2 U6B.6 | length 350.9
  Top Layer w7: R77B.2@3594,2238 3744,2238 R24B.1@3772,2210 ; C77B.1@3772,2143 R24B.1@3772,2210 ; U6B.6@3780,2301 3772,2293 R24B.1@3772,2210
NetC77C_1: C77C.1 R24C.1 R77C.2 U6C.6 | length 350.9
  Top Layer w7: R77C.2@3595,1039 3745,1039 R24C.1@3773,1011 ; C77C.1@3773,944 R24C.1@3773,1011 ; U6C.6@3781,1102 3773,1094 R24C.1@3773,1011
NetC77D_1: C77D.1 R24D.1 R77D.2 U6D.6 | length 350.9
  Top Layer w7: R77D.2@3595,441 3745,441 R24D.1@3773,413 ; C77D.1@3773,346 R24D.1@3773,413 ; U6D.6@3781,504 3773,496 R24D.1@3773,413
NetC80A_1: C80A.1 C84A.1 R29A.1 R56A.2 U5A.3 | length 855.8
  Top Layer w7: C80A.1@3144,2955 C84A.1@3144,2890 3184,2850 R29A.1@3184,2815 3184,2795 3160,2771 v1@3160,2746
  Top Layer w10: R56A.2@2684,2871 2840,2715 3129,2715 v1(3159,2745) v1@3160,2746
  Bottom Layer w7: v1@3159,2747 U5A.3@3159,2813.88
NetC80B_1: C80B.1 C84B.1 R29B.1 R56B.2 U5B.3 | length 864.7
  Top Layer w7: C80B.1@3144,2359 C84B.1@3144,2294 3184,2254 R29B.1@3184,2219 3184,2199 3160,2175 v1(3160,2150)
  Top Layer w10: R56B.2@2684,2275 2686,2275 2851,2110 3120,2110 v1(3160,2150)
  Bottom Layer w7: U5B.3@3159,2217.88 3159,2151 v1(3160,2150)
NetC80C_1: C80C.1 C84C.1 R29C.1 R56C.2 U5C.3 | length 866.4
  Top Layer w7: C80C.1@3145,1160 C84C.1@3145,1095 3185,1055 R29C.1@3185,1020 3185,1000 3161,976 v1(3161,951)
  Top Layer w10: R56C.2@2685,1076 2852,909 3119,909 v1(3161,951)
  Bottom Layer w7: U5C.3@3160,1018.88 3160,952 v1(3161,951)
NetC80D_1: C80D.1 C84D.1 R29D.1 R56D.2 U5D.3 | length 857.3
  Top Layer w7: C80D.1@3145,562 C84D.1@3145,497 3185,457 R29D.1@3185,422 3185,402 3161,378 v1(3161,353)
  Top Layer w10: R56D.2@2685,478 2841,322 3130,322 v1(3161,353)
  Bottom Layer w7: U5D.3@3160,420.88 3160,354 v1(3161,353)
NetC82_1: C82.1 U19.3 | length 70.2
  Bottom Layer w7: U19.3@1148,2594 1151,2597 C82.1@1217,2597
NetC86A_1: C86A.1 R30A.1 R31A.2 | length 140
  Top Layer w7: C86A.1@2855,2883 R30A.1@2855,2953 R31A.2@2925,2953
NetC86B_1: C86B.1 R30B.1 R31B.2 | length 140
  Top Layer w7: C86B.1@2855,2287 R30B.1@2855,2357 R31B.2@2925,2357
NetC86C_1: C86C.1 R30C.1 R31C.2 | length 140
  Top Layer w7: C86C.1@2856,1088 R30C.1@2856,1158 R31C.2@2926,1158
NetC86D_1: C86D.1 R30D.1 R31D.2 | length 140
  Top Layer w7: C86D.1@2856,490 R30D.1@2856,560 R31D.2@2926,560
NetC87A_1: C87A.1 R26A.2 R29A.2 R31A.1 | length 237.2
  Top Layer w7: R31A.1@2985,2953 C87A.1@2985,2883 3007,2883 3075,2815 R29A.2@3124,2815
NetC87B_1: C87B.1 R26B.2 R29B.2 R31B.1 | length 237.2
  Top Layer w7: R31B.1@2985,2357 C87B.1@2985,2287 3007,2287 3075,2219 R29B.2@3124,2219
NetC87C_1: C87C.1 R26C.2 R29C.2 R31C.1 | length 237.2
  Top Layer w7: R31C.1@2986,1158 C87C.1@2986,1088 3008,1088 3076,1020 R29C.2@3125,1020
NetC87D_1: C87D.1 R26D.2 R29D.2 R31D.1 | length 237.2
  Top Layer w7: R31D.1@2986,560 C87D.1@2986,490 3008,490 3076,422 R29D.2@3125,422
NetC88AF_1: C88AF.1 C89AF.1 R93AF.2 R94AF.1 | length 365.6
  Top Layer w10: R94AF.1@2082,2968 2139.49,2910.51 C89AF.1@2139.49,2770.39 v2(2139.49,2735.95) 2139.49,2701.51 C88AF.1@2139.37,2701.39 2139.37,2635.63 R93AF.2@2146,2629
NetC88AF_2: C88AF.2 C89AF.2 R22AF.2 R32AF.1 R100AF.1 | length 582
  Top Layer w7: R32AF.1@1788,2841 1808,2841 1886,2763 2070.98,2763 2079.49,2771.51 C89AF.2@2079.49,2770.39
  Top Layer w10: R100AF.1@2000,2578 2027,2578 R22AF.2@2078,2629 2079.37,2630.37 C88AF.2@2079.37,2701.39 2079.37,2770.27 C89AF.2@2070.49,2761.39
NetC88DF_1: C88DF.1 C89DF.1 R93DF.2 R94DF.1 | length 393
  Top Layer w10: R94DF.1@1830,1424 1882,1476 C88DF.1@2040,1476 C89DF.1@2107,1476 2166,1417 R93DF.2@2177,1417
NetC88DF_2: C88DF.2 C89DF.2 R22DF.2 R32DF.1 R100DF.1 | length 704.4
  Top Layer w7: R32DF.1@1962,1125 2051,1214 2051,1360 C89DF.2@2107,1416 ; C88DF.2@2040,1416 C89DF.2@2107,1416 ; R22DF.2@2248,1438 2246,1436 2246,1372 R100DF.1@2222,1348 ; 2252,1318 R100DF.1@2222,1348 ; C89DF.2@2107,1416 2143,1380 2190,1380 R100DF.1@2222,1348
NetC93_2: C93.2 R33.2 R34.1 U19.5 | length 2646.7
  Top Layer w7: v2(1131,2019) 1131,2017 1106.5,1992.5 1106.5,1655.5 1129,1633 1129,1399 1104,1374 1104,1094 1222,976 1333,976 v2(1363,946) ; v2(1653.27,496.8) R34.1@1721.44,496.8
  Bottom Layer w7: U19.5@963,2569 963,2563.56 1052.56,2474 1067,2474 1148,2393 1148,2036 v2(1131,2019) ; R33.2@1362,1010 R33.2@1362,1001 C93.2@1362,896.87 1362,744 1609,497 v2@1655,497
NetC94_1: C94.1 R34.2 R35.1 | length 137.4
  Top Layer w7: C94.1@1782.27,565.22 1782.27,497.62 1851.65,497.62 R35.1@1851.93,497.9
NetC95_1: C95.1 R35.2 U12.5 U13.6 U14.5 | length 3483.8
  Top Layer w7: 1502.7,2343.7 1540.47,2381.47 U13.6@1730.24,2381.47 ; U12.5@1736.14,3201.79 1765,3201.79 1779,3187.79 1779,3106 1725,3052 1725,3007 1681,2963 1557,2963 1527,2933 1510,2916 1510,2761 1527,2744 1540.47,2730.53 1540.47,2549.47 1527,2536 1501,2510 1501,2211 1642,2070 1642,1415 1547.62,1320.62 1547.62,1047.38 1597.37,997.63 v2(1597.37,986.16) 1597.51,986.02 U14.5@1597.51,950.74 1597.51,918.49 1666,850 1666,744 1842.87,567.13 C95.1@1912.04,567.13 1912.04,498.01 R35.2@1911.93,497.9
NetC96_1: C96.1 L17.2 U19.8 | length 536.4
  Top Layer w20: L17.2@647,2556 727.36,2556 756.51,2526.85 C96.1@984.64,2526.85
  Bottom Layer w20: v5(864,2527.5) 925,2588.5 925,2631.63 947.37,2654 973,2654
NetC98_1: C98.1 L10.2 U12.8 | length 702.1
  Top Layer w40: L10.2@1224.78,2813.63 1224.78,2845.57 v5(1310.79,2931.58) ; C98.1@1617.61,3026.92 C98.1@1630.21,3026.92 ; C98.1@1653.15,3058.44 v5(1653.15,3087.42) 1682.13,3116.4 1741.16,3116.4
  Bottom Layer w40: v5(1310.79,2931.58) 1385.92,3006.71 1572.44,3006.71 1613.44,3047.71 v5(1653.15,3087.42)
NetC101_2: C101.2 L11.1 R38.2 U13.1 U13.2 U13.8 | length 1084.7
  Top Layer w7: L11.1@1223.18,2312.17 L11.1@1262.49,2272.86 ; R38.2@1865.8,2211.35 1865.8,2212.03 U13.1@1935.24,2281.47
  Top Layer w40: v5(1262.49,2185.63) L11.1@1262.49,2272.86 ; C101.2@1582.67,2263.59 1600.56,2281.47 v5(1665.4,2281.47) U13.8@1730.24,2281.47 U13.1@1935.24,2281.47 U13.2@1935.24,2321.9
  Bottom Layer w40: v5(1262.49,2185.63) 1490.03,2185.63 1578,2273.6 1633,2273.6 1657.53,2273.6 v5(1665.4,2281.47)
NetC103_1: C103.1 U14.3 | length 66.8
  Top Layer w7: C103.1@1615.08,1199.48 1622.51,1192.05 U14.3@1622.51,1135.74
NetC105A_1: C105A.1 L18A.1 R23A.2 | length 148.3
  Top Layer w7: C105A.1@3957,3008 4022,3008 L18A.1@4027,3003 4027,2931 R23A.2@4024,2928
NetC105A_2: C105A.2 L19A.1 R21A.2 | length 147.8
  Top Layer w7: C105A.2@3957,3068 3983,3094 4020,3094 R21A.2@4020,3168
NetC105B_1: C105B.1 L18B.1 R23B.2 | length 149.1
  Top Layer w7: C105B.1@3960,2418 4025,2418 4025,2341 R23B.2@4020,2336
NetC105B_2: C105B.2 L19B.1 R21B.2 | length 153
  Top Layer w7: C105B.2@3960,2478 4008,2478 4025,2495 R21B.2@4025,2576
NetC105C_1: C105C.1 L18C.1 R23C.2 | length 124
  Top Layer w7: C105C.1@3952,1202 4008,1202 4008,1151 R23C.2@4020,1139
NetC105C_2: C105C.2 L19C.1 R21C.2 | length 158.9
  Top Layer w7: C105C.2@3952,1262 3985,1262 L19C.1@4020,1297 4021,1298 R21C.2@4021,1373
NetC105D_1: C105D.1 L18D.1 R23D.2 | length 143
  Top Layer w7: C105D.1@3954,613 4020,613 R23D.2@4020,536
NetC105D_2: C105D.2 L19D.1 R21D.2 | length 151.9
  Top Layer w7: C105D.2@3954,673 4003,673 4022,692 R21D.2@4022,768
NetC109_1: C109.1 U12.3 | length 61.6
  Top Layer w7: U12.3@1921.14,3176.79 1978.2,3176.79 C109.1@1981.42,3180.01
NetC111_1: C111.1 L12.2 U14.8 | length 764
  Top Layer w40: L12.2@1207.95,704.25 v5@1275.75,704.25 ; 1684.31,950.48 1684.31,883.14 C111.1@1729.25,838.2
  Mid-Layer 2 w40: v5(1275,705) 1600,705 1685.92,790.92 v5(1685.92,909.69)
NetC113AF_2: C113AF.2 C126AF.2 R110AF.2 U20AF.2 | length 227.3
  Top Layer w20: v2(1870,2743) 1905,2708 U20AF.2@1905,2673
  Bottom Layer w20: C113AF.2@1837,2743 v2(1870,2743) ; R110AF.2@1872,2667 1870,2669 v2(1870,2743) ; C126AF.2@1903,2743 v2(1870,2743)
NetC113DF_2: C113DF.2 C126DF.2 R110DF.2 U20DF.2 | length 210.7
  Top Layer w20: v2(2073,1244) U20DF.2@2129,1244
  Bottom Layer w20: C113DF.2@2033,1179 C126DF.2@2033,1244 v2(2073,1244) 2099.77,1244 R110DF.2@2116,1260.23
NetDP1_1: DP1.1 R102.1 | length 68.7
  Top Layer w7: R102.1@-433,3432 -364.58,3432 DP1.1@-364.4,3432.18
NetDP2_2: DP2.2 R103.2 | length 68.6
  Bottom Layer w7: R103.2@-117,3432 -48.97,3432 DP2.2@-48.6,3432.37
NetIn5V5n_1: In5V5n.1 L11.2 R44.2 | length 149.8
  Top Layer w40: R44.2@1024.76,2131.67 1024.76,2190 1095,2190 In5V5n.1@1110,2175
NetIoutAA_1: IoutAA.1 L9A.3 R82A.2 U5A.1 | length 434.4
  Top Layer w7: v1@3258,2746 3258,2813 3350,2905 L9A.3@3359,2905 3359,2880 R82A.2@3405,2834 3398,2827 IoutAA.1@3338,2827
  Bottom Layer w7: v1@3258,2746 3258,2812.88 U5A.1@3259,2813.88
  other v1: 3258,2747
NetIoutAB_1: IoutAB.1 L9B.3 R82B.2 U5B.1 | length 435.8
  Top Layer w7: v1(3258,2150) 3258,2217 3350,2309 L9B.3@3359,2309 3359,2284 R82B.2@3405,2238 3345,2238 IoutAB.1@3337,2230
  Bottom Layer w7: v1(3258,2150) 3258,2216.88 U5B.1@3259,2217.88
NetIoutAC_1: IoutAC.1 L9C.3 R82C.2 U5C.1 | length 432.3
  Top Layer w7: v1(3259,951) 3259,1018 3351,1110 L9C.3@3360,1110 3360,1085 R82C.2@3406,1039 3404,1037 IoutAC.1@3339,1037
  Bottom Layer w7: v1(3259,951) 3259,1017.88 U5C.1@3260,1018.88
NetIoutAD_1: IoutAD.1 L9D.3 R82D.2 U5D.1 | length 436.5
  Top Layer w7: v1(3259,353) 3259,420 3351,512 L9D.3@3360,512 3360,487 R82D.2@3406,441 3401,436 IoutAD.1@3336,436
  Bottom Layer w7: v1(3259,353) 3259,419.88 U5D.1@3260,420.88
NetIoutBA_1: IoutBA.1 L9A.1@3359,3105 R83A.2 U5A.27 | length 360
  Top Layer w7: v1(3209,3240) 3293,3240 3359,3174 ; L9A.1@3359,3105 3359,3174 ; R83A.2@3406,3176 3404,3174 3359,3174
  Bottom Layer w7: U5A.27@3209,3174.12 v1(3209,3240)
NetIoutBB_1: IoutBB.1 L9B.1@3359,2509 R83B.2 U5B.27 | length 360
  Top Layer w7: v1(3209,2644) 3293,2644 3359,2578 ; L9B.1@3359,2509 3359,2578 ; R83B.2@3406,2580 3404,2578 3359,2578
  Bottom Layer w7: U5B.27@3209,2578.12 v1(3209,2644)
NetIoutBC_1: IoutBC.1 L9C.1@3360,1310 R83C.2 U5C.27 | length 360
  Top Layer w7: v1(3210,1445) 3294,1445 3360,1379 ; L9C.1@3360,1310 3360,1379 ; R83C.2@3407,1381 3405,1379 3360,1379
  Bottom Layer w7: U5C.27@3210,1379.12 v1(3210,1445)
NetIoutBD_1: IoutBD.1 L9D.1@3360,712 R83D.2 U5D.27 | length 360
  Top Layer w7: v1(3210,847) 3294,847 3360,781 ; L9D.1@3360,712 3360,781 ; R83D.2@3407,783 3405,781 3360,781
  Bottom Layer w7: U5D.27@3210,781.12 v1(3210,847)
NetIp3V7n_1: Ip3V7n.1 L12.1 R45.2 | length 283.3
  Top Layer w40: R45.2@885,710 997.03,710 L12.1@1001.28,714.25 1001.28,860.72 Ip3V7n.1@988,874
NetIp5V5n_1: Ip5V5n.1 L10.1 R43.2 | length 173.3
  Top Layer w40: L10.1@1028.11,2813.63 1051.29,2836.81 1051.29,2957 1055.29,2953 Ip5V5n.1@1070,2953
NetJ1_21: J1.21 J1.23 | length 39.4
  Top Layer w6.5: J1.23@194.52,1474.93 J1.21@194.52,1514.3
NetJ2_12: J2.12 L14.2 | length 238.8
  Bottom Layer w20: L14.2@4377,958 4612.22,958 J2.12@4614.75,960.53
NetL9A_4: L9A.4 R77A.1 R82A.1 | length 162.8
  Top Layer w7: R82A.1@3465,2834 R77A.1@3534,2834 3534,2850 L9A.4@3589,2905
NetL9A_5: L9A.5 R84A.1 | length 70
  Top Layer w7: L9A.5@3600.03,3018.25 3621.78,3040 R84A.1@3661,3040
NetL9A_6: L9A.6 R76A.2 R83A.1 | length 162.4
  Top Layer w7: R83A.1@3466,3176 R76A.2@3535,3176 3589,3122 L9A.6@3589,3105
NetL9B_4: L9B.4 R77B.1 R82B.1 | length 162.8
  Top Layer w7: R82B.1@3465,2238 R77B.1@3534,2238 3534,2254 L9B.4@3589,2309
NetL9B_5: L9B.5 R84B.1 | length 70
  Top Layer w7: L9B.5@3600.03,2422.25 3621.78,2444 R84B.1@3661,2444
NetL9B_6: L9B.6 R76B.2 R83B.1 | length 162.4
  Top Layer w7: R83B.1@3466,2580 R76B.2@3535,2580 3589,2526 L9B.6@3589,2509
NetL9C_4: L9C.4 R77C.1 R82C.1 | length 162.8
  Top Layer w7: R82C.1@3466,1039 R77C.1@3535,1039 3535,1055 L9C.4@3590,1110
NetL9C_5: L9C.5 R84C.1 | length 70
  Top Layer w7: L9C.5@3601.03,1223.25 3622.78,1245 R84C.1@3662,1245
NetL9C_6: L9C.6 R76C.2 R83C.1 | length 162.4
  Top Layer w7: R83C.1@3467,1381 R76C.2@3536,1381 3590,1327 L9C.6@3590,1310
NetL9D_4: L9D.4 R77D.1 R82D.1 | length 162.8
  Top Layer w7: R82D.1@3466,441 R77D.1@3535,441 3535,457 L9D.4@3590,512
NetL9D_5: L9D.5 R84D.1 | length 70
  Top Layer w7: L9D.5@3601.03,625.25 3622.78,647 R84D.1@3662,647
NetL9D_6: L9D.6 R76D.2 R83D.1 | length 162.4
  Top Layer w7: R83D.1@3467,783 R76D.2@3536,783 3590,729 L9D.6@3590,712
NetL13_2: L13.2 R46.2 | length 191.8
  Top Layer w20: L13.2@871.15,1705 L13.2@899.88,1676.27
  Top Layer w40: R46.2@720,1705 L13.2@871.15,1705
NetP1_D30: P1.D30 P1.D31 | length 50
  Bottom Layer w8: P1.D30@-429.98,2372.99 P1.D31@-429.98,2422.99
NetP1_D32: P1.D32 R106.1 | length 574.6
  Top Layer w7: R106.1@-712,2184 v3(-712,2225)
  Mid-Layer 1 w7: v3(-712,2225) -712,2373 -630,2455 -556,2455 -514,2497 v4(-410,2497)
  Bottom Layer w7: P1.D32@-429.98,2472.99 -429.98,2477.02 v4(-410,2497)
NetP1_F1: P1.F1 R106.2 | length 1589.6
  Top Layer w7: v3(-714,2087) -712,2089 R106.2@-712,2124
  Bottom Layer w7: v3(-714,2087) -714,976 -619,881 -371.96,881 P1.F1@-329.98,922.99